# Altium PCB PCB1.PcbDoc
Units mm, origin at the board's own origin, x right, y up, seen from the top; angles counter-clockwise.
Board outline 42 x 42 mm, 4 copper layers (Top Layer, Int1 (GND), Int2 (PWR), Bottom Layer), stack 1.585 mm thick; 56 components, 41 nets, 206 pads, 92 vias.
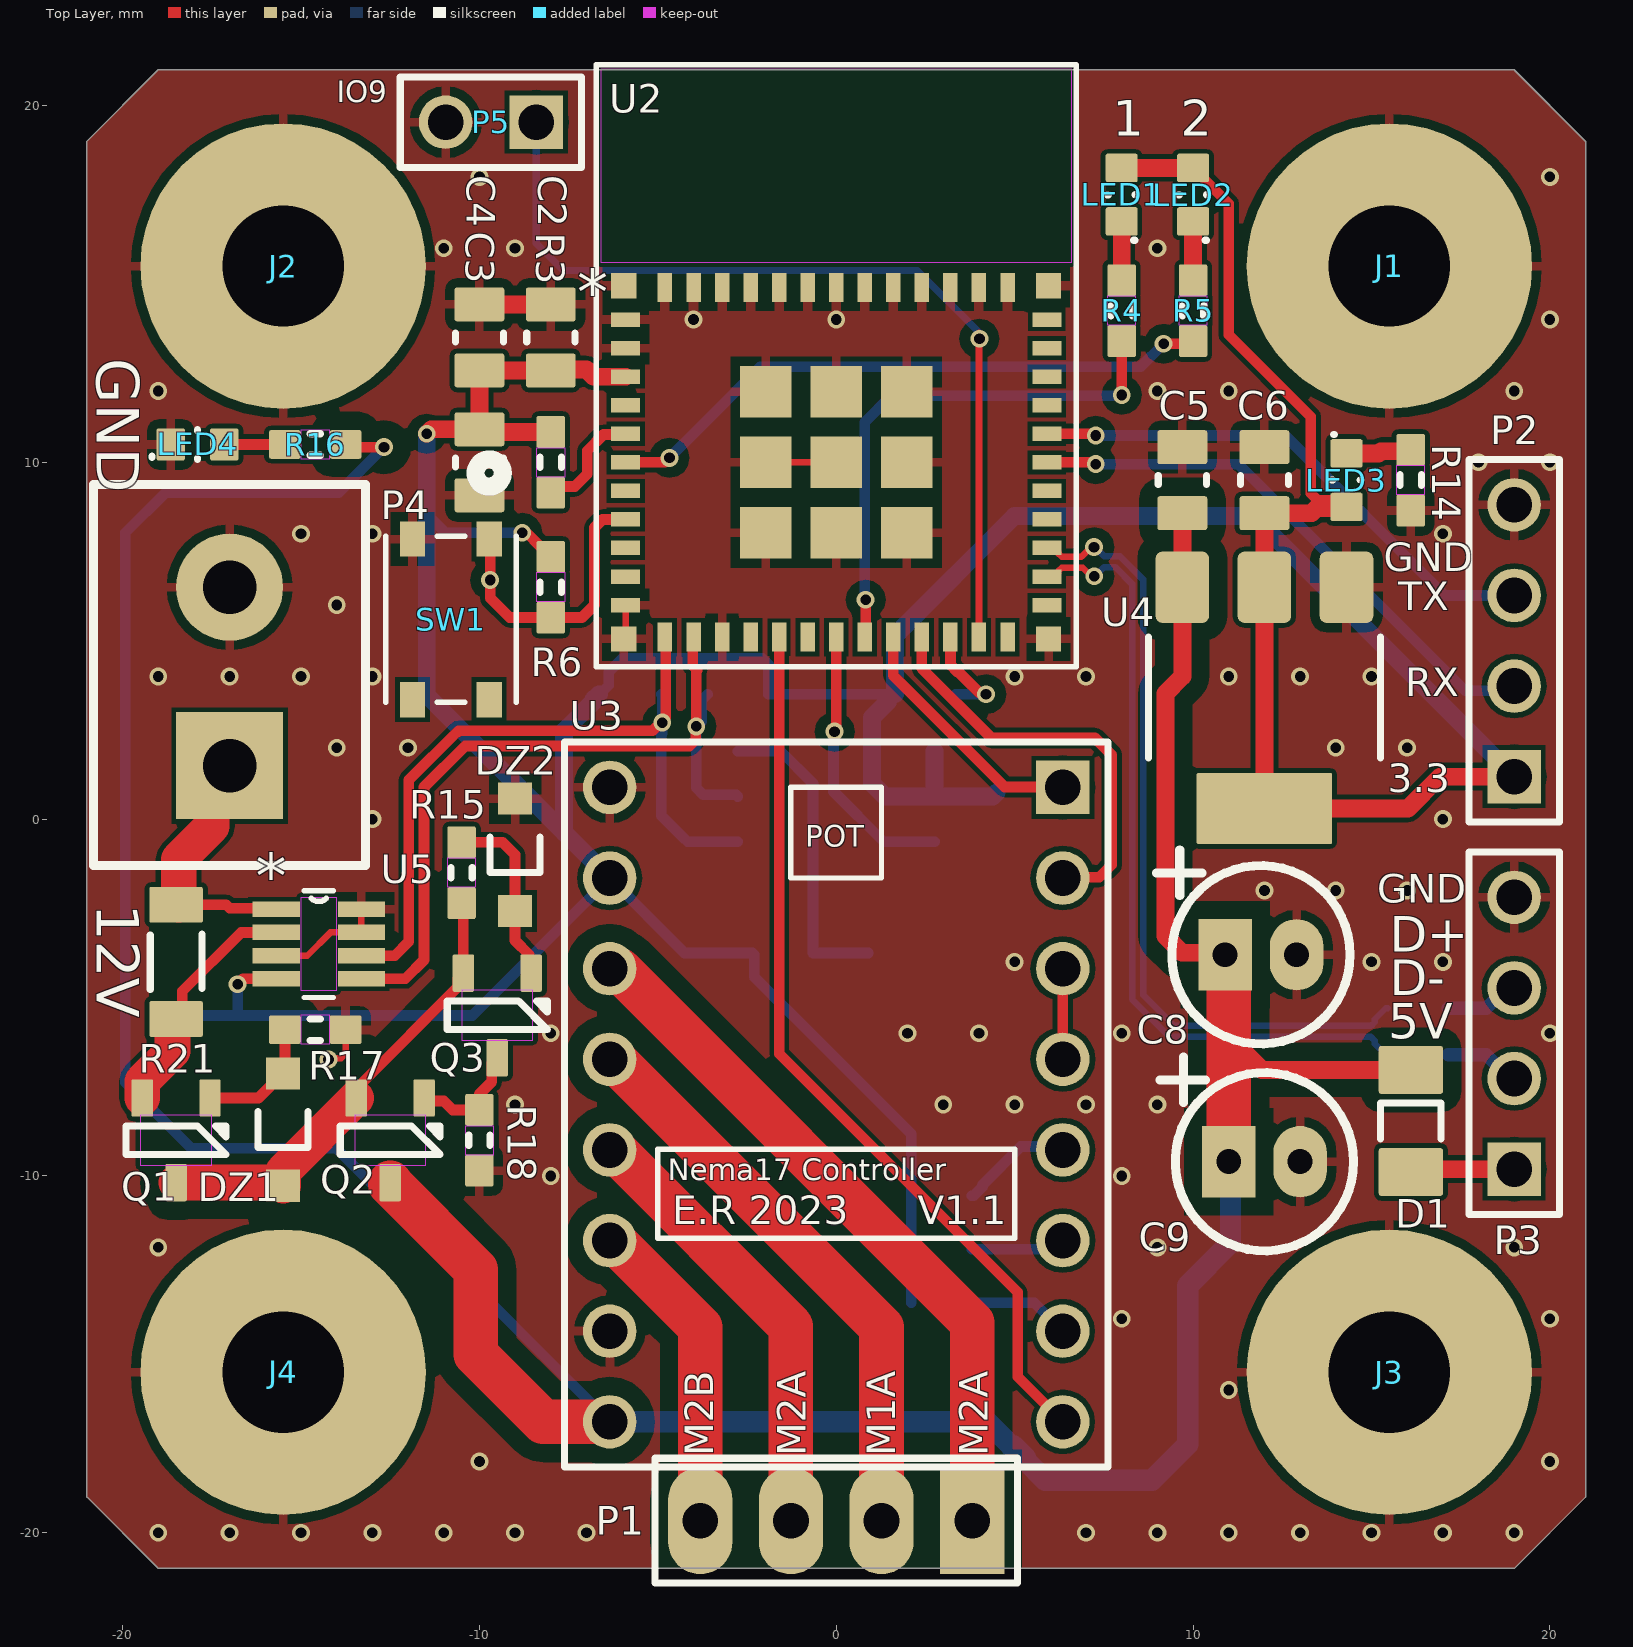
[diagram p0: Top Layer view]
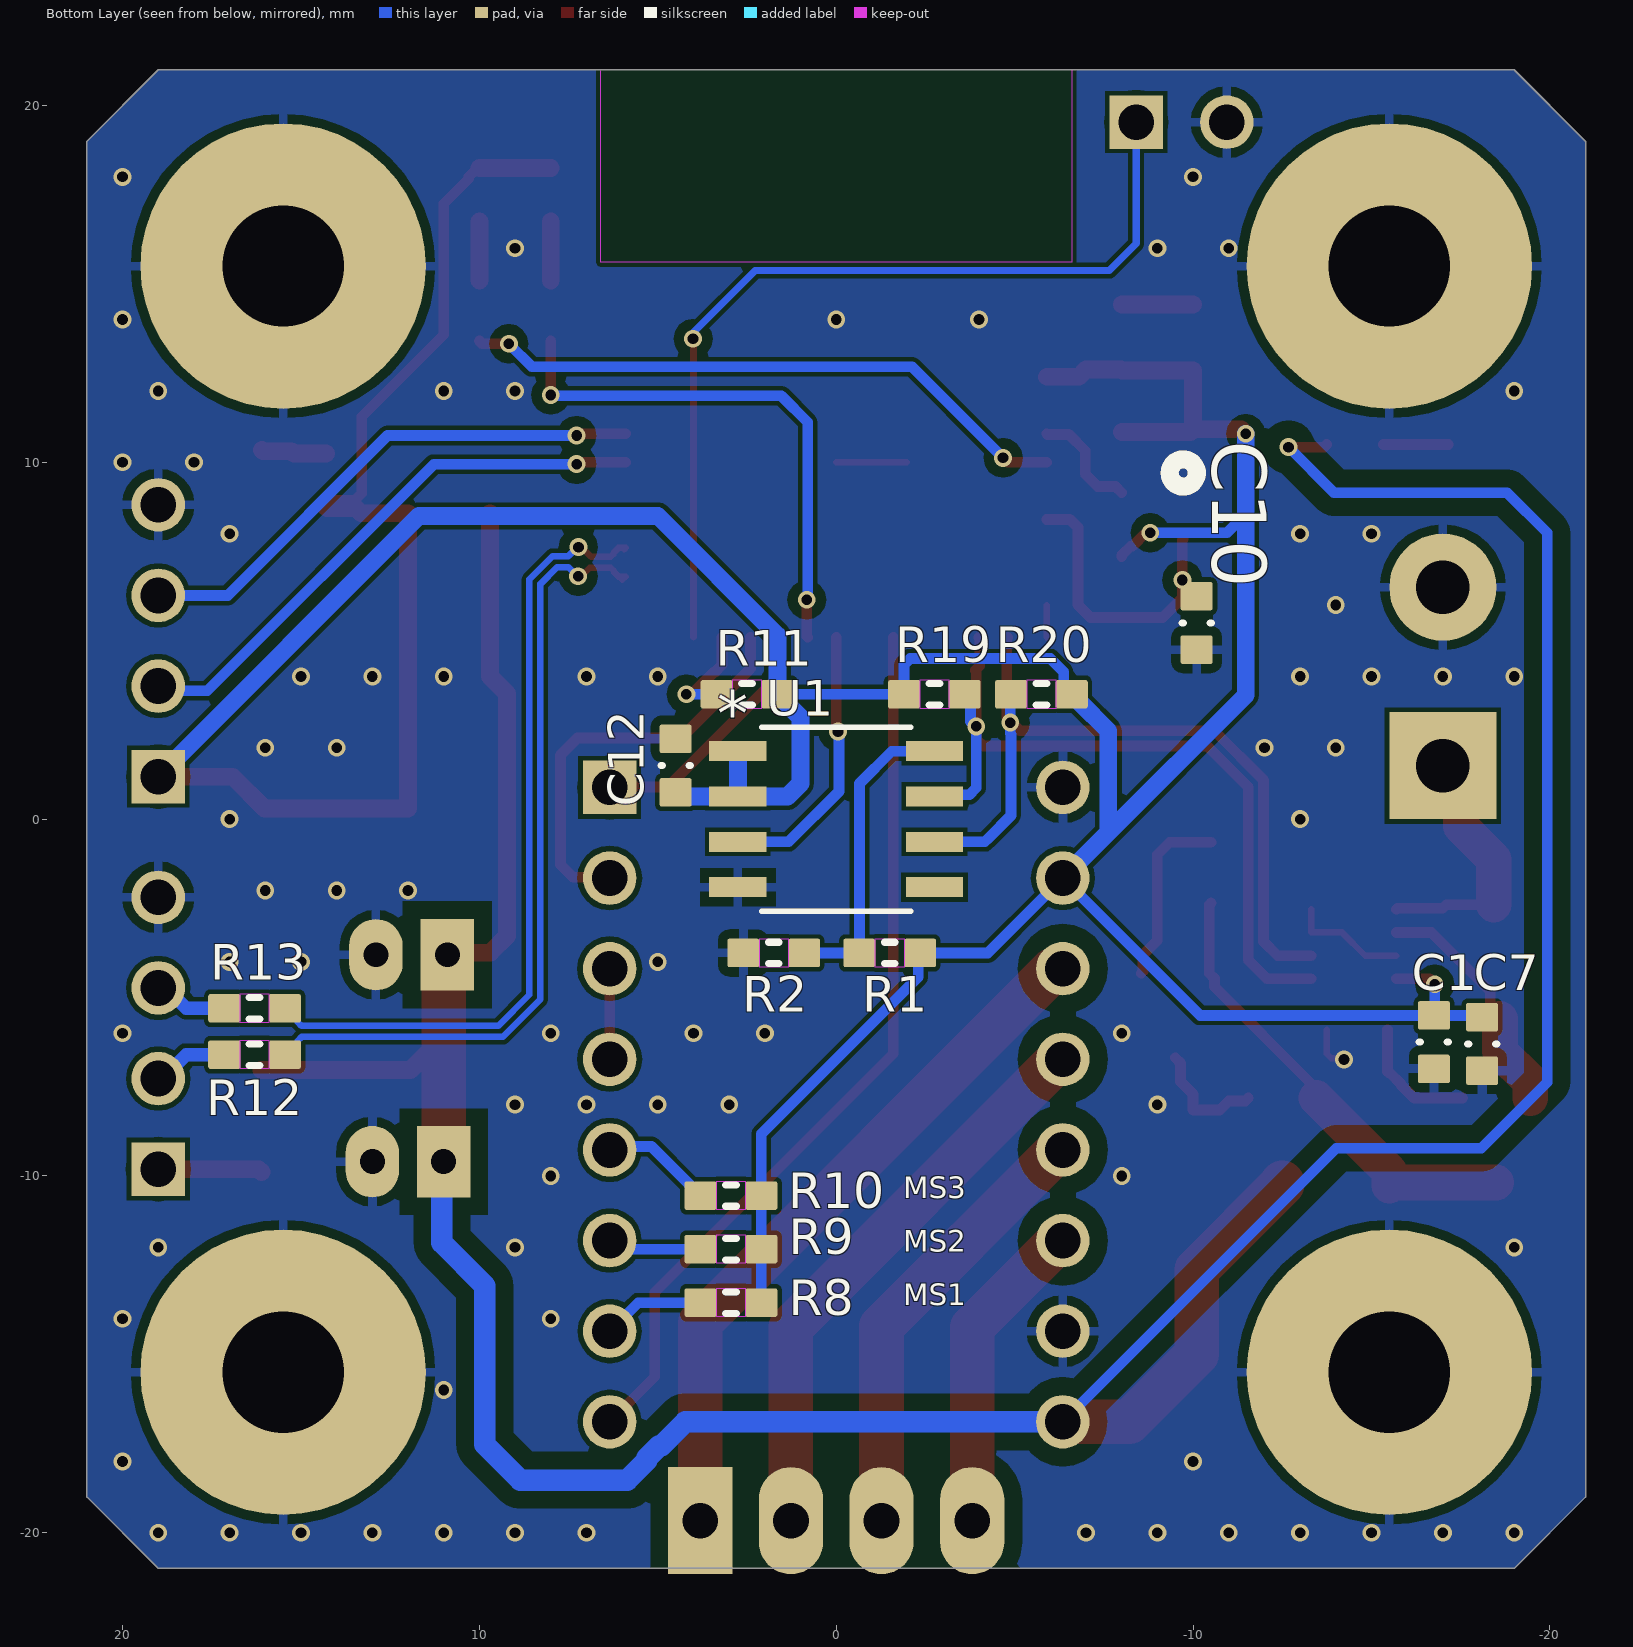
[diagram p1: Bottom Layer view, seen from below]
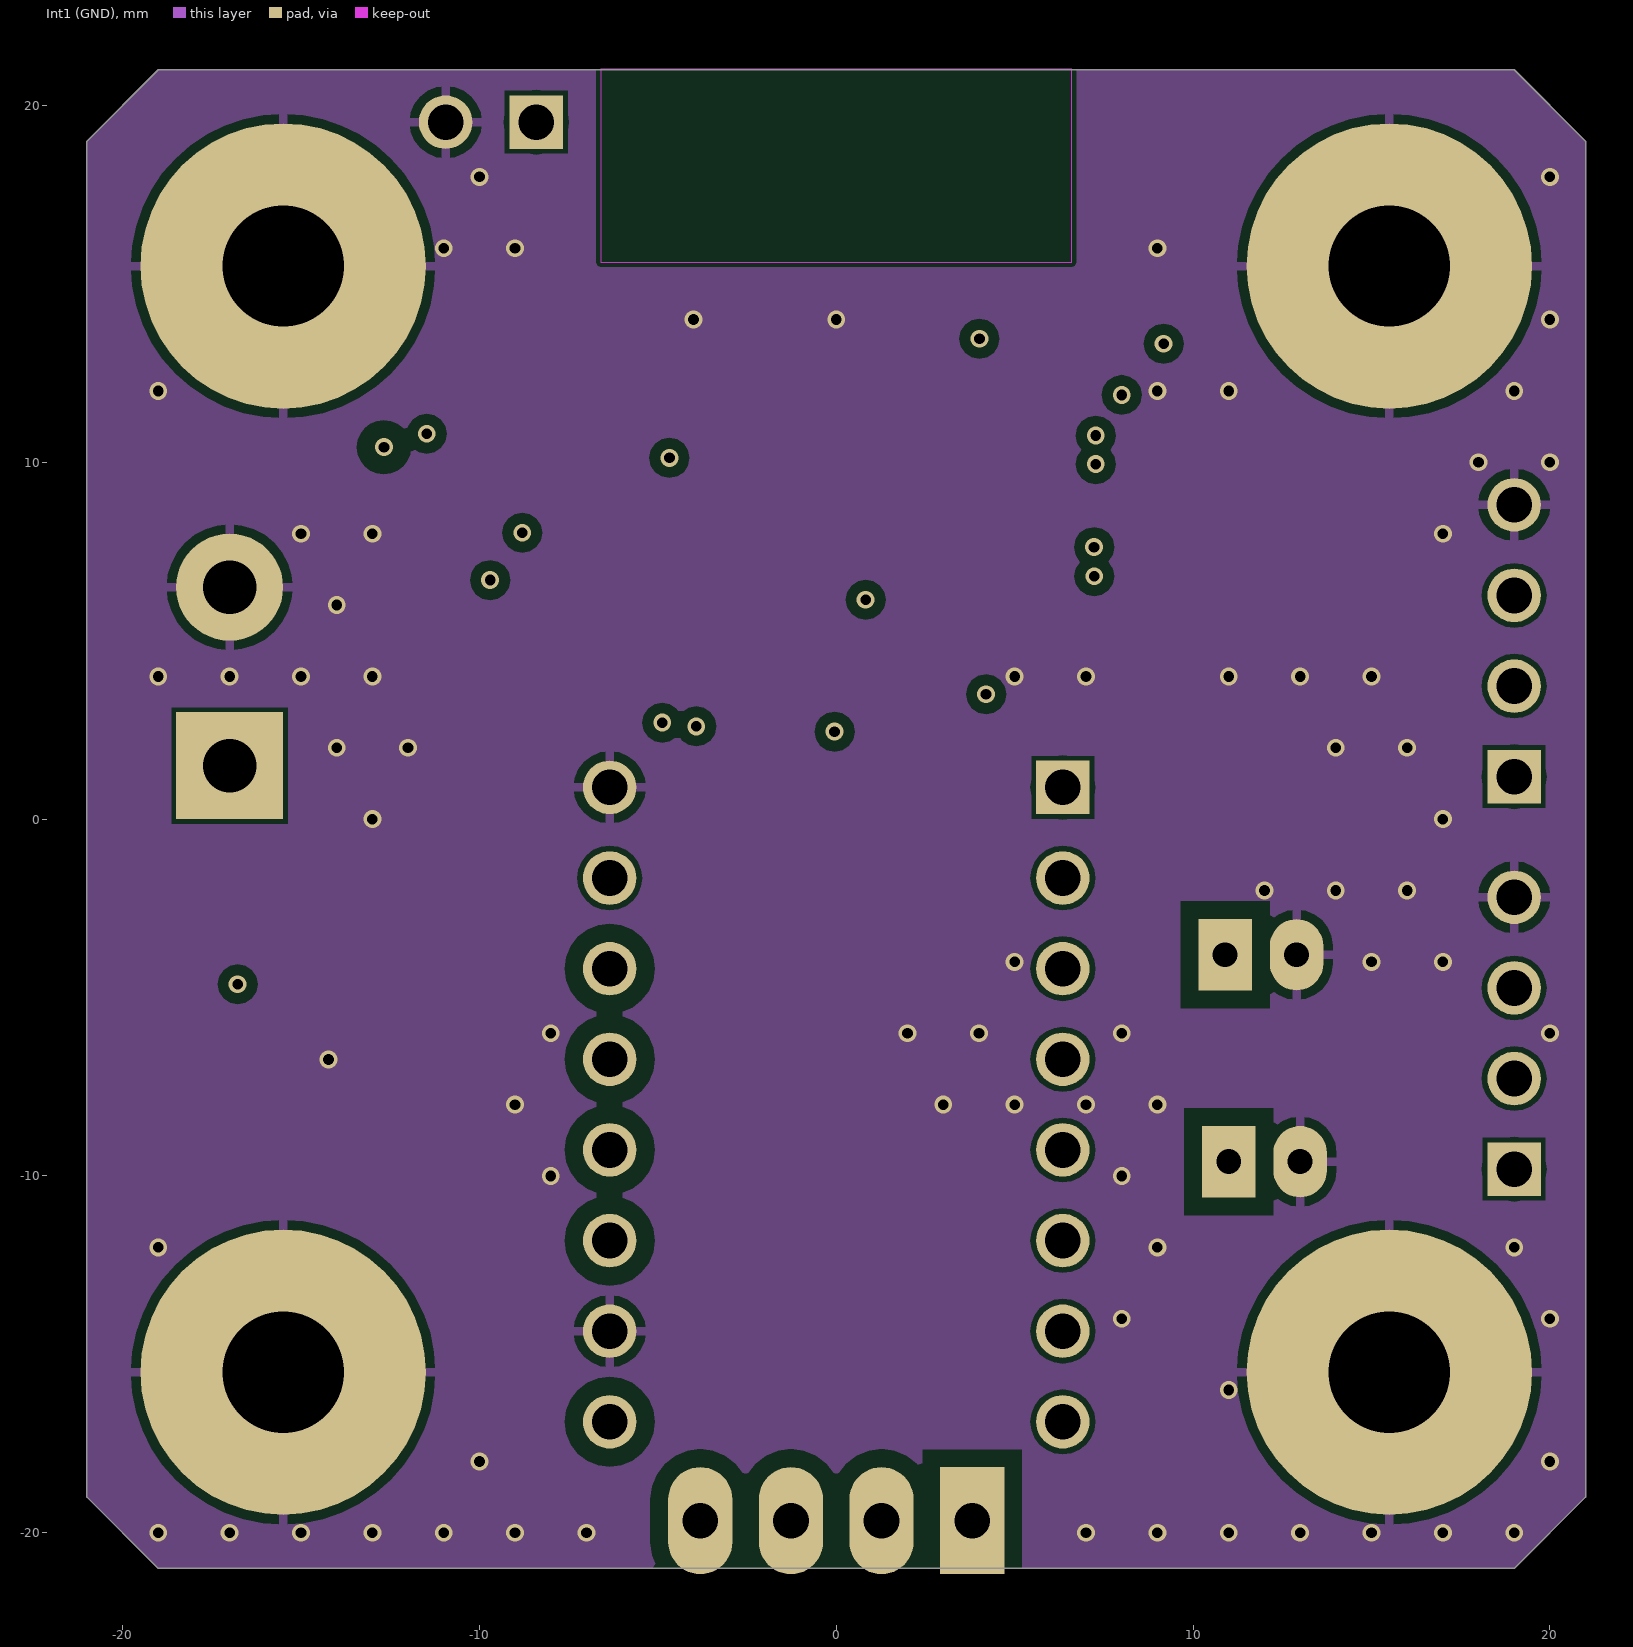
[diagram p2: Int1 (GND)]
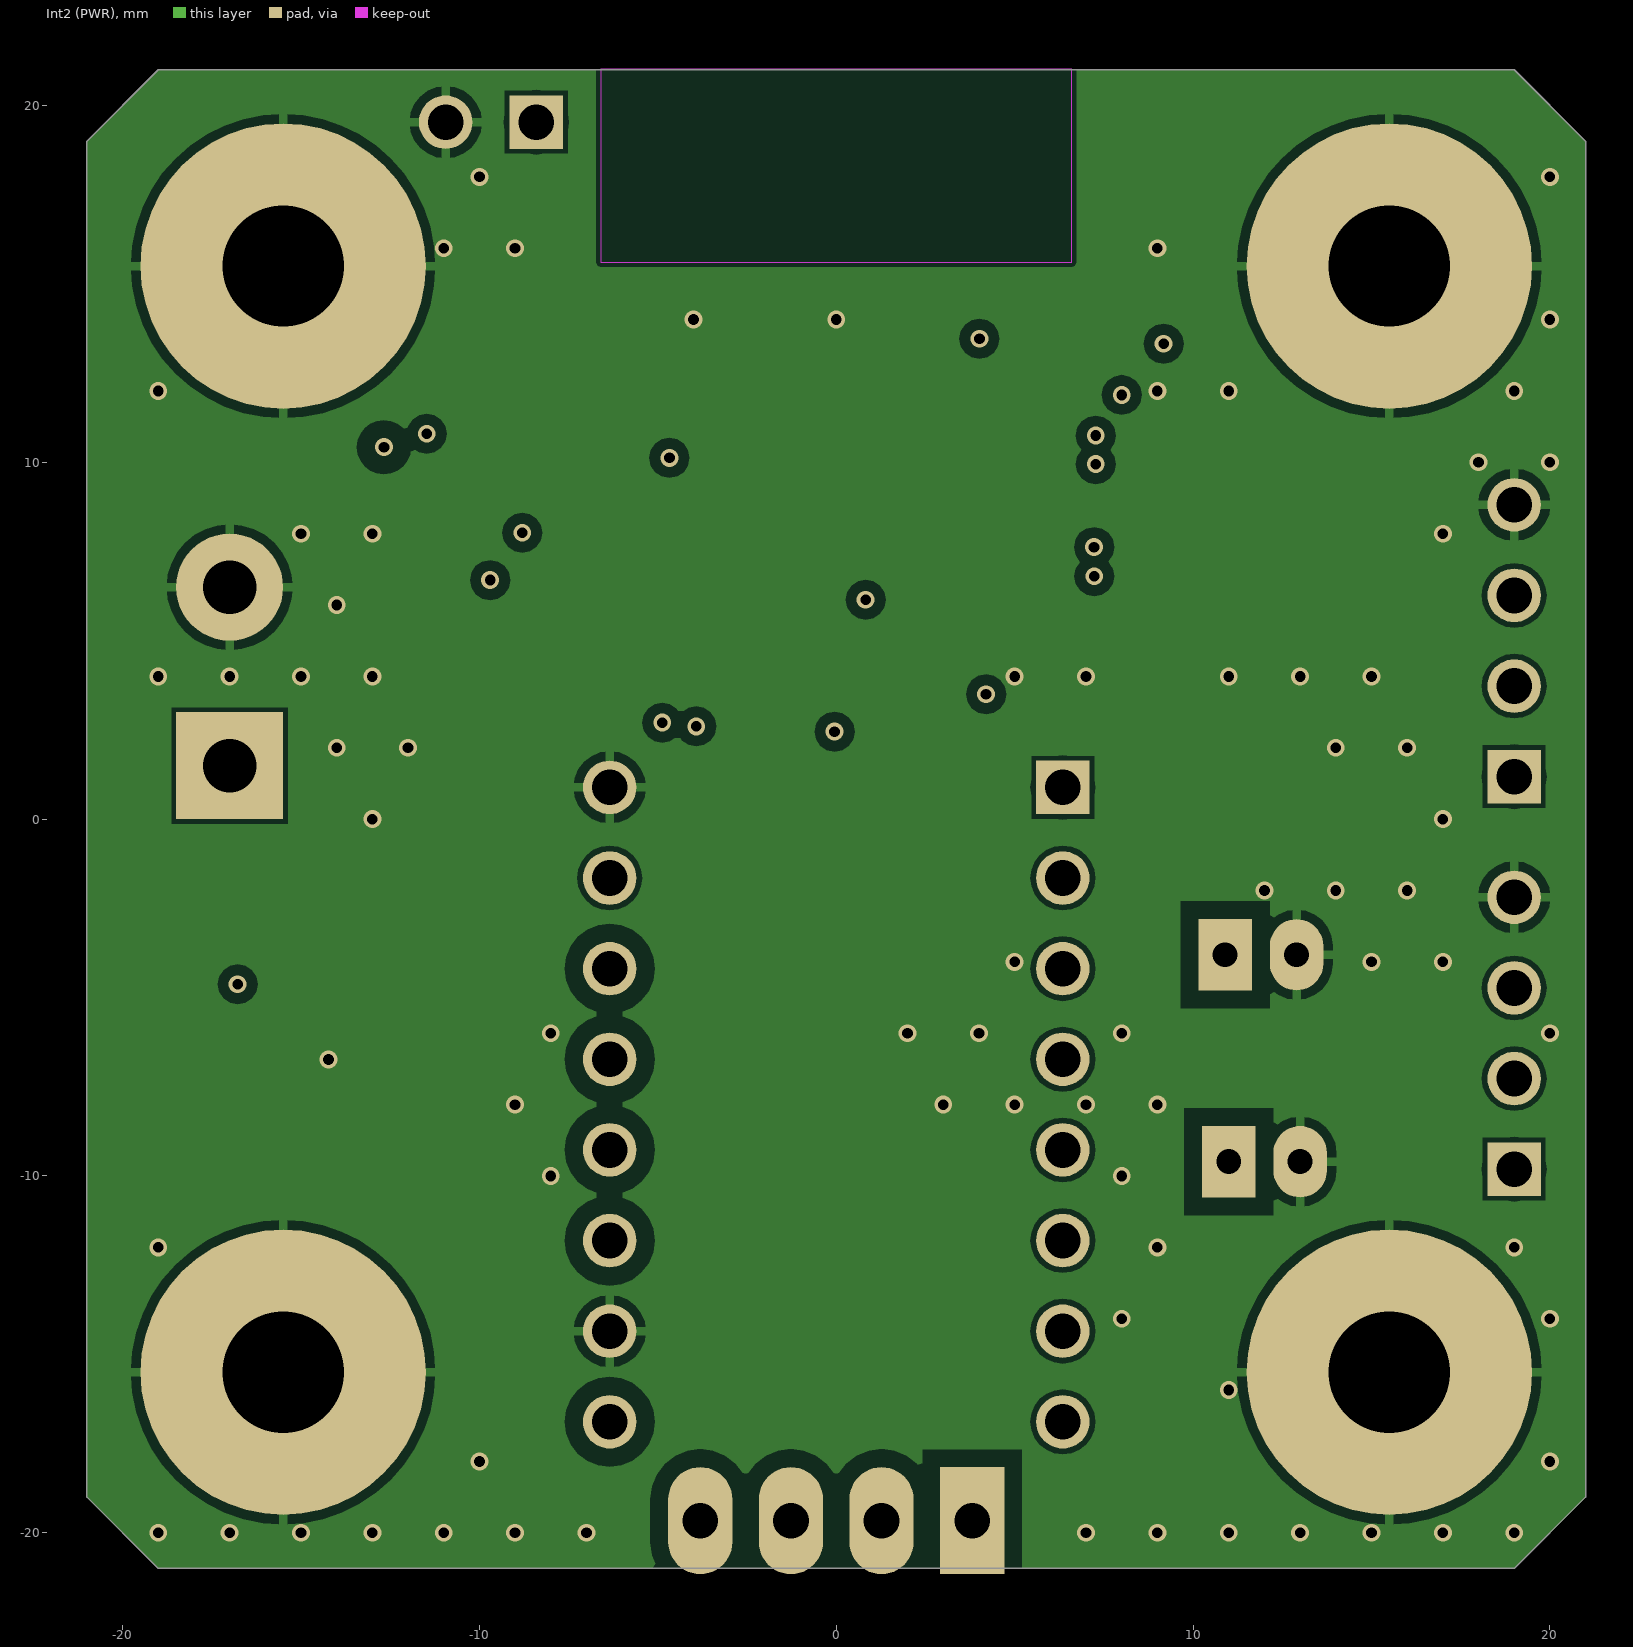
[diagram p3: Int2 (PWR)]
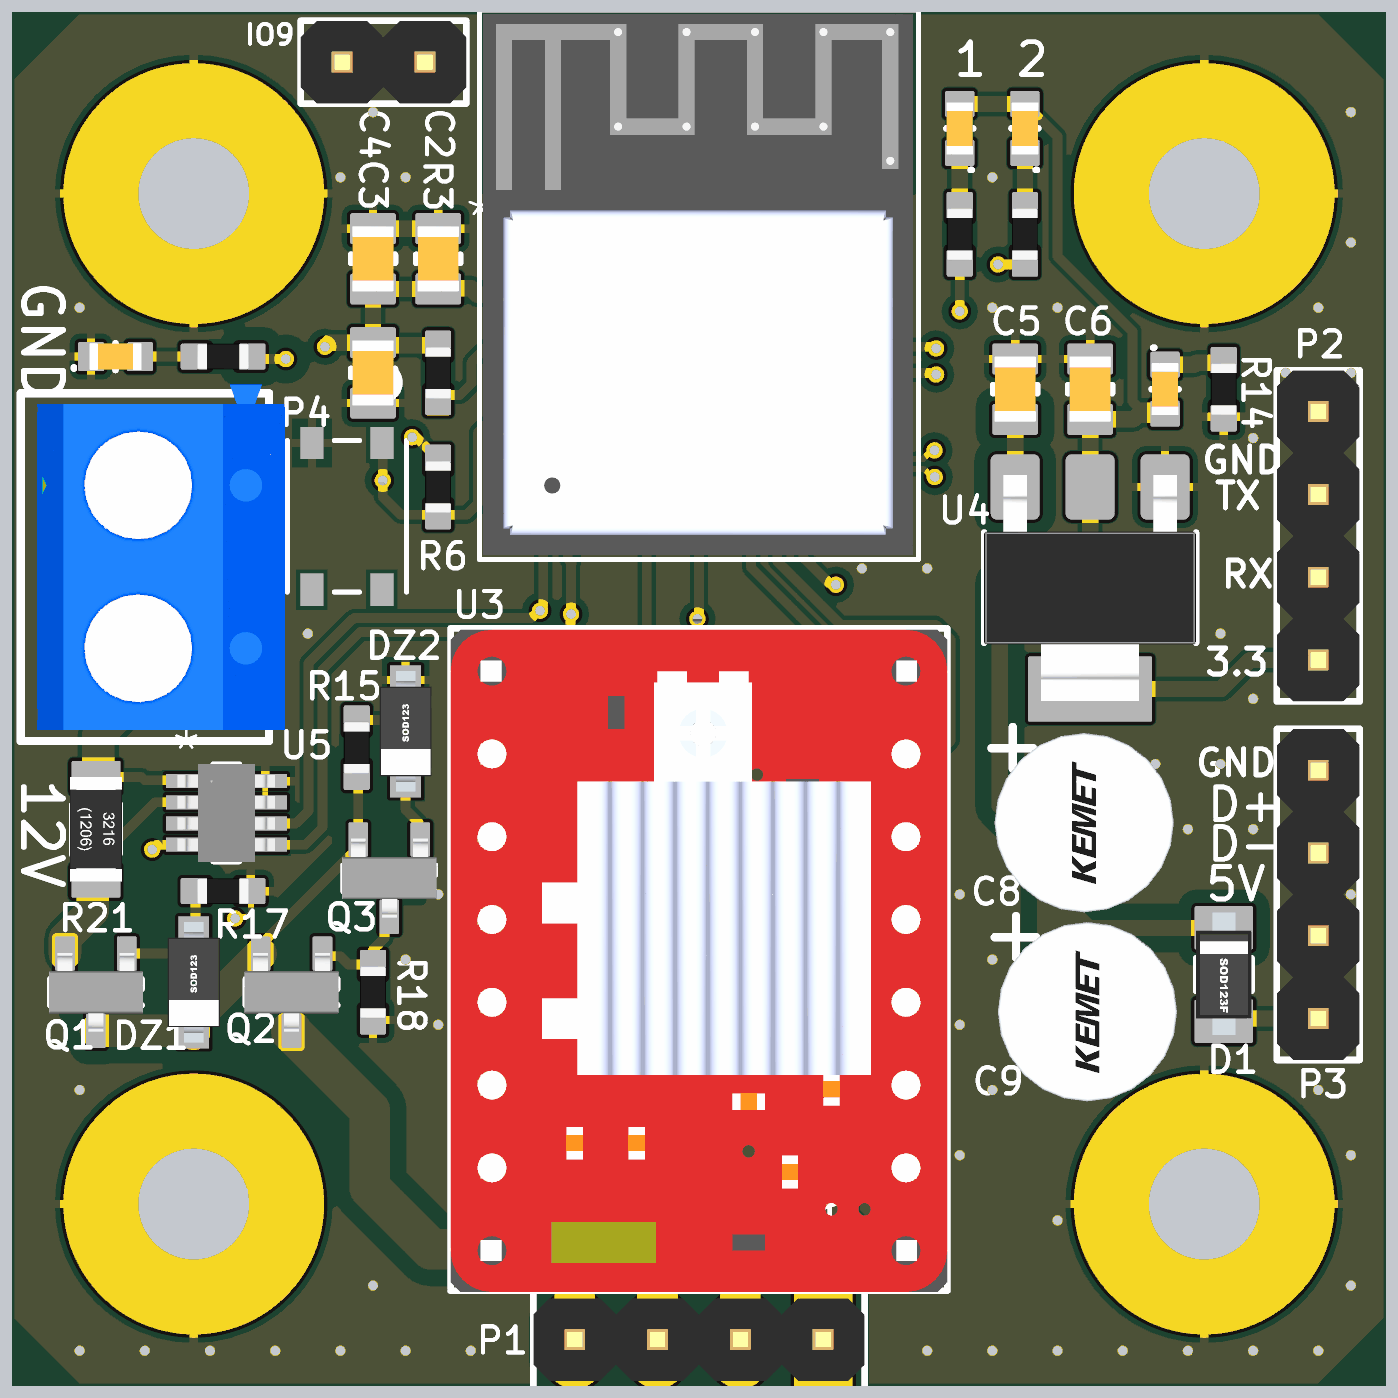
[diagram p4: 3D render of the assembled board from above, using the file's embedded part models]
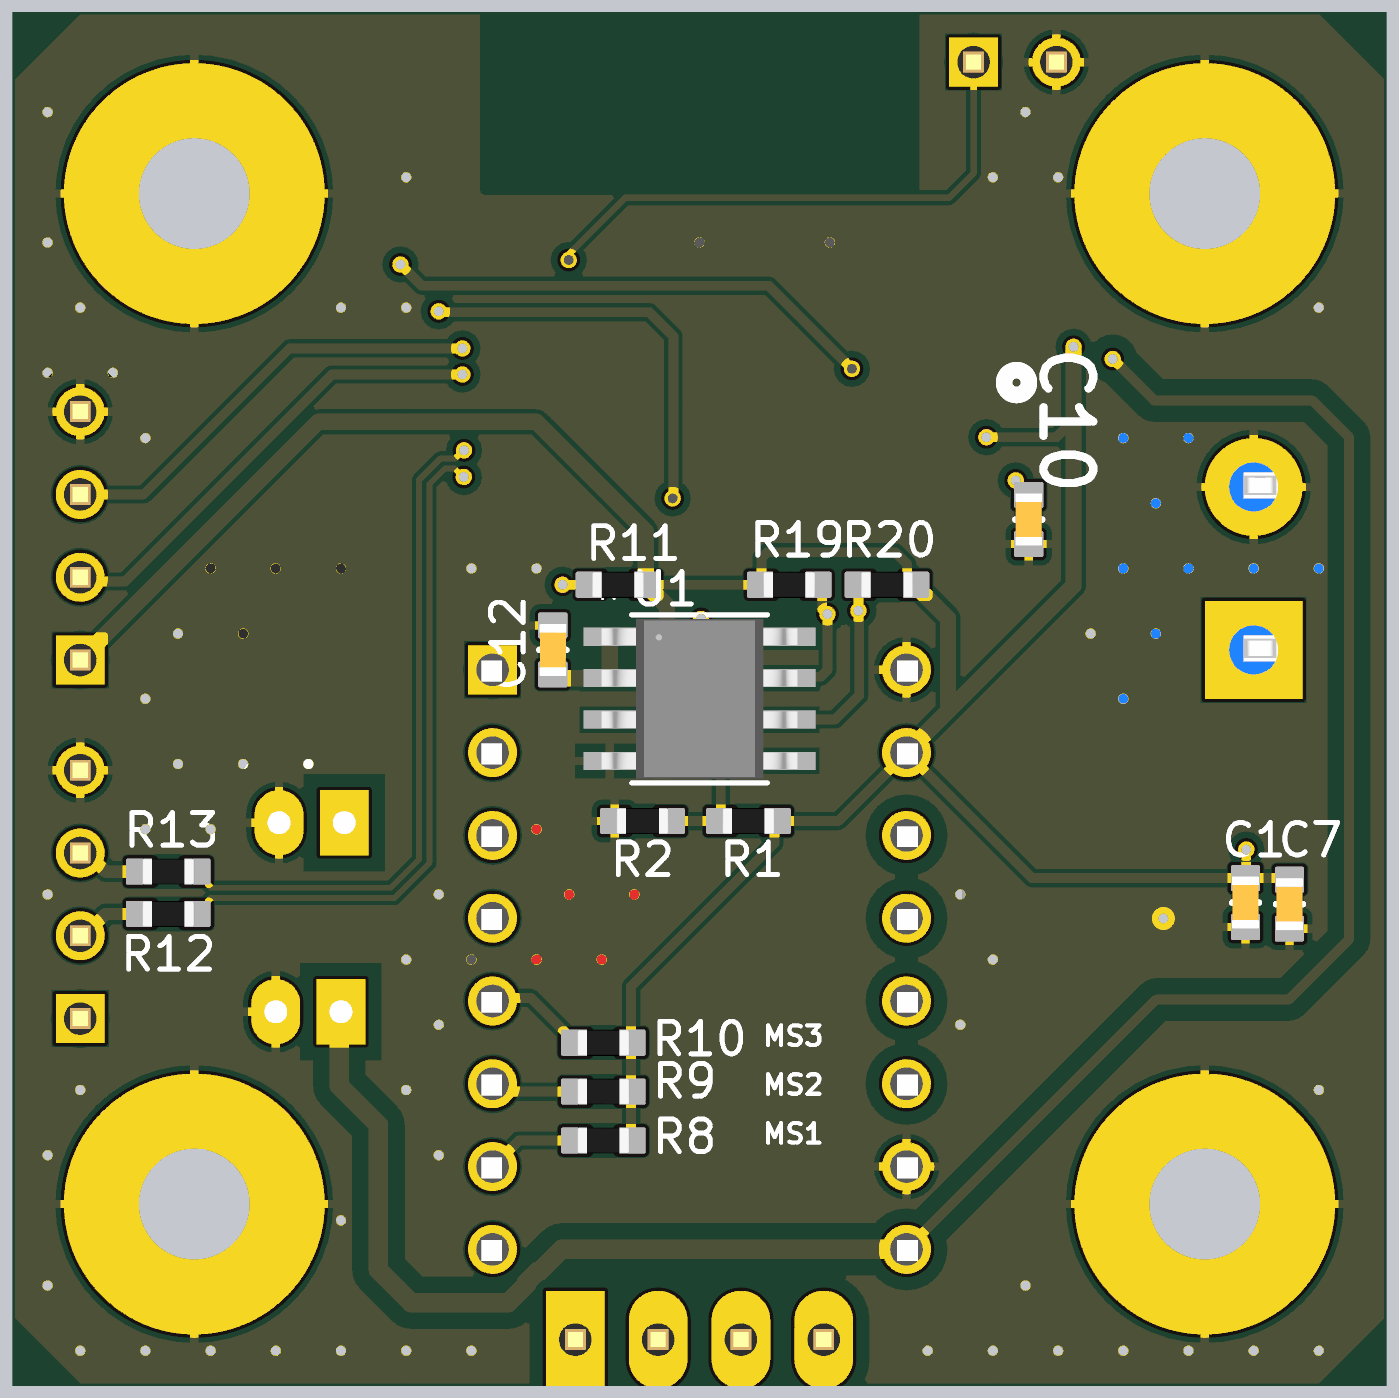
[diagram p5: 3D render of the assembled board from below, using the file's embedded part models]

## Layer stack, top to bottom
Top Solder: solder mask 0.035, SM-001, Dk 4
Top Layer: signal copper 0.035
Dielectric 2: prepreg 0.21, PP-017, Dk 4.6
Int1 (GND): signal copper 0.015
Dielectric 3: core 1.065, Core-039, Dk 4.6
Int2 (PWR): signal copper 0.015
Dielectric 4: prepreg 0.21, PP-017, Dk 4.6
Bottom Layer: signal copper 0.035
Bottom Solder: solder mask 0.035, SM-001, Dk 4

## Board outline
-21,-19 -21,19 -19,21 19,21 21,19 21,-19 19,-21 -19,-21

## Design rules (kind name [scope] priority, off if disabled: settings)
Clearance Clearance_Power [InNetClass('Power')] p1: gap=0.5 ignorepadtopadclearanceinfootprint=FALSE except(0.3: Arc-THPad Track-THPad SMDPad-THPad THPad-THPad)
Clearance Clearance_signal [All] p2: gap=0.127 ignorepadtopadclearanceinfootprint=FALSE except(0.254: Arc-Via Track-Via THPad-Via Via-Via; 0.4: SMDPad-Hole THPad-Hole Via-Hole Fill-Hole Poly-Hole Region-Hole)
ComponentClearance [All] p1 off: gap=0.254 collisioncheckmode=3 verticalgap=0.254 showdistances=FALSE
DiffPairsRouting [All] p1: maxlimit=0.254 minlimit=0.127 mostfreqgap=0.254 toplayer_maxgap=0.127 toplayer_prefgap=0.127 toplayer_minwidth=0.182 toplayer_maxwidth=0.182 toplayer_prefwidth=0.182 bottomlayer_maxgap=0.127 bottomlayer_prefgap=0.127 bottomlayer_minwidth=0.182 bottomlayer_maxwidth=0.182 bottomlayer_prefwidth=0.182 impedanceprofiledriven=TRUE impedanceprofileid={B48823B5-F17F-4A22-9D6E-0B69BC30809E} impedanceprofilevalue=90.000000 maxuncoupledlength=12.7
Height [All] p1 off: minheight=0 maxheight=25.4 prefheight=12.7
HoleSize [All] p1 off: absolutevalues=TRUE maxlimit=2.54 minlimit=0.025 maxpercent=80.000 minpercent=20.000
MinimumSolderMaskSliver [All] p1 off: minsoldermaskwidth=0.254
PasteMaskExpansion [All] p1 off: expansion=0
PlaneConnect [All] p1: pad.planeconnectstyle=Relief pad.reliefexpansion=0.508 pad.reliefentries=4 pad.reliefconductorwidth=0.254 pad.reliefairgap=0.254 via.planeconnectstyle=Direct via.reliefexpansion=0.508 via.reliefentries=4 via.reliefconductorwidth=0.254 via.reliefairgap=0.254
PolygonConnect PolygonConnect_Power [InNetClass('Power')] p1: connectstyle=Direct reliefconductorwidth=0.254 reliefentries=4 polygonreliefangle="90 Angle" airgapwidth=0.254
PolygonConnect [All] p2: thpad.connectstyle=Relief thpad.reliefconductorwidth=0.254 thpad.reliefentries=4 thpad.polygonreliefangle="90 Angle" thpad.airgapwidth=0.254 smdpad.connectstyle=Relief smdpad.reliefconductorwidth=0.254 smdpad.reliefentries=4 smdpad.polygonreliefangle="90 Angle" smdpad.airgapwidth=0.254 via.connectstyle=Direct via.reliefconductorwidth=0.254 via.reliefentries=4 via.polygonreliefangle="90 Angle" via.airgapwidth=0.254
RoomDefinition main [InComponentClass('main')] p1 off: confinementstyle=ConfineIn formatcopy=TRUE lockcomponents=FALSE outline 22,-19 300,-19 300,6 22,6
RoutingVias [All] p1: holewidth=0.3 width=0.5 viastyle="Through Hole" minholewidth=0.15 minwidth=0.25 maxholewidth=1 maxwidth=1.3
SilkToSilkClearance [All] p1 off: silktosilkclearance=0.254
SilkToSolderMaskClearance [IsPad] p1 off: minsilkscreentomaskgap=0.254 clearancetoexposedcopper=TRUE
SolderMaskExpansion [All] p1 off: expansion=0.102 istentingtop=FALSE
Width Width_Power(5A) [InNetClass('Power')] p1: maxlimit=2 minlimit=0.3 preferedwidth=1.25
Width Width_signal [All] p2: maxlimit=1 minlimit=0.1 preferedwidth=0.2
21 further rules are at their usual default settings.

## Classes and differential pairs
net class Power: +12 M1A M1B M2A M2B NetDZ1_1 NetDZ1_2
differential pair USB_Diff: +USB_P -USB_N

## Components (designator, comment, footprint, x,y, rotation, side; value= is the part's Value field where it differs from the comment)
C1 "Capacitor-0603-1uF-25V-X5R" CAPACITOR-0603 -16.75,-6.25 r90 bottom value=1uF
C2 "Capacitor-0805-10uF-35V-X5R" CAPACITOR-0805 -8,13.5 r270 top value=10uF
C3 "Capacitor-0805-10uF-35V-X5R" CAPACITOR-0805 -10,10 r90 top value=10uF
C4 "Capacitor-0805-10uF-35V-X5R" CAPACITOR-0805 -10,13.5 r270 top value=10uF
C5 "Capacitor-0805-10uF-35V-X5R" CAPACITOR-0805 9.7,9.5 r270 top value=10uF
C6 "Capacitor-0805-10uF-35V-X5R" CAPACITOR-0805 12,9.5 r270 top value=10uF
C7 "Capacitor-0603-1uF-25V-X5R" CAPACITOR-0603 -18.1,-6.3 r90 bottom value=1uF
C8 "CAP ALUM 100UF 20% 25V RADIAL" CAPACITOR-Aluminium-5x11mm-2mmPitch 11.9,-3.8 r90 top value=100uF
C9 "CAP ALUM 100UF 20% 25V RADIAL" CAPACITOR-Aluminium-5x11mm-2mmPitch 12,-9.6 r90 top value=100uF
C10 "Capacitor-0603-1uF-25V-X5R" CAPACITOR-0603 -10.1,5.5 r90 bottom value=1uF
C12 "Capacitor-0603-1uF-25V-X5R" CAPACITOR-0603 4.5,1.5 r270 bottom value=1uF
D1 "SMD110PL-TP" SOD-123F 16.104,-8.458 r90 top
DZ1 "BZT52C6V2-TP" SOD-123 -15.5,-8.7 r270 top
DZ2 "BZT52C13-TP" SOD-123 -9,-1 r270 top
J1 "hole" HOLE-3.40MM-M3-8MMEYELET#1 16,16 r0 top
J2 "hole" HOLE-3.40MM-M3-8MMEYELET#2 -16,16 r0 top
J3 "hole" HOLE-3.40MM-M3-8MMEYELET#3 16,-16 r0 top
J4 "hole" HOLE-3.40MM-M3-8MMEYELET#4 -16,-16 r0 top
LED1 "B1911USD-20D000114U1930" LED-0603-2PIN 8,17.5 r90 top
LED2 "B1911USD-20D000114U1930" LED-0603-2PIN 10,17.5 r90 top
LED3 "B1911USD-20D000114U1930" LED-0603-2PIN 14.3,9.5 r270 top
LED4 "B1911USD-20D000114U1930" LED-0603-2PIN -17.9,10.5 r0 top
P1 "4pos-TH-2.54mm" HDR1X4-W 0,-19.66 r180 top
P2 "UART" HDR1X4 19,5 r90 top
P3 "USB" HDR1X4 19,-6 r90 top
P4 "2pos-TH-5.0mm" "Weco 2" -17,4 r90 top
P5 "2pos-TH-2.54mm" HDR1X2 -8.407,19.533 r180 top
Q1 "SSM3J332R" SOT-23-3 -18.5,-9 r180 top
Q2 "SSM3J332R" SOT-23-3 -12.5,-9 r180 top
Q3 "SSM3J332R" SOT-23-3 -9.5,-5.5 r180 top
R1 "SMT resistor" Resistor-0603 -1.5,-3.75 r180 bottom value=0
R2 "SMT resistor" Resistor-0603 1.75,-3.75 r180 bottom value=NP
R3 "SMT resistor" Resistor-0603 -8,10 r90 top value=10k
R4 "SMT resistor" Resistor-0603 8,14.25 r90 top value=1k
R5 "SMT resistor" Resistor-0603 10,14.25 r90 top value=1k
R6 "SMT resistor" Resistor-0603 -8,6.5 r90 top value=10k
R8 "SMT resistor" Resistor-0603 2.95,-13.55 r180 bottom value=0
R9 "SMT resistor" Resistor-0603 2.95,-12.05 r180 bottom value=0
R10 "SMT resistor" Resistor-0603 2.95,-10.55 r180 bottom value=0
R11 "SMT resistor" Resistor-0603 2.5,3.5 r180 bottom value=10k
R12 "SMT resistor" Resistor-0603 16.3,-6.6 r180 bottom value=0
R13 "SMT resistor" Resistor-0603 16.3,-5.3 r180 bottom value=0
R14 "SMT resistor" Resistor-0603 16.1,9.5 r90 top value=1k
R15 "SMT resistor" Resistor-0603 -10.5,-1.5 r270 top value=10k
R16 "SMT resistor" Resistor-0603 -14.6,10.5 r0 top value=1k
R17 "SMT resistor" Resistor-0603 -14.6,-5.9 r180 top value=10k
R18 "SMT resistor" Resistor-0603 -10,-9 r90 top value=10k
R19 "SMT resistor" Resistor-0603 -2.75,3.5 r0 bottom value=4.7k
R20 "SMT resistor" Resistor-0603 -5.75,3.5 r180 bottom value=4.7k
R21 "SMT resistor" RESISTOR-1206 -18.5,-4 r270 top value=10mR
SW1 "PTS815 SJM 250 SMTR LFS" "SW4_PTS815 SJM 250 SMTR LFS_CNK" -10.8,5.6 r270 top
U1 "AS5600-ASOM" AS5600L-ASOM_AMS 0,0 r180 bottom
U2 "ESP32-C3-MINI-1-H4" ESP32-C3-MINI-1_EXP 0,12.705 r0 top
U3 "Stepper Driver" A4899 0,-8 r270 top
U4 "NCV1117ST33T3G" SOT-223-3/TO-261-3S 12,6.5 r180 top
U5 "INA219AIDCNR" SOT-23-8 -14.5,-3.5 r0 top

## Footprints (in the part's own frame and the unit in brackets; to place one, negate y for a bottom-side part, rotate by r counter-clockwise, add the part's x,y. Pads: shape width x height; smd on the part's side, far side on the other; paste and mask are expansions set on the pad)
A4899 [mm] "Connector; Header; 2 Position"
  rect 1.5x1.5 hole 1: 1(-8.89,6.35)
  round 1.5 hole 1: 2(-6.35,6.35) 3(-3.81,6.35) 4(-1.27,6.35) 5(1.27,6.35) 6(3.81,6.35) 7(6.35,6.35) 8(8.89,6.35) 9(8.89,-6.35) 10(6.35,-6.35) 11(3.81,-6.35) 12(1.27,-6.35) 13(-1.27,-6.35) 14(-3.81,-6.35) 15(-6.35,-6.35) 16(-8.89,-6.35)
  silkscreen extent -10.16,-7.62 10.16,7.62, body extent -10.12,-7.62 10.2,7.62, height 10.04
AS5600L-ASOM_AMS [mil]
  rect 63.11x22 smd paste+0 mask+0: 1(-108.56,75) 2(-108.56,25) 3(-108.56,-25) 4(-108.56,-75) 5(108.56,-75) 6(108.56,-25) 7(108.56,25) 8(108.56,75)
  silkscreen extent -82,-102 82,102, body extent -118,-96 118,96, height 69
CAPACITOR-0603 [mm] "Metric 1608, EIA 0603. Per Yageo Product Specification V2.2"
  rrect15% 0.8x0.9 smd: 1(-0.75,0) 2(0.75,0)
  Top Layer pour cut-out: -0.35,0.45 0.35,0.45 0.35,-0.45 -0.35,-0.45
  silkscreen extent 0,-0.41 0,0.41, body extent -0.93,-0.41 0.93,0.41, height 0.81
CAPACITOR-0805 [mm] "Metric 2012, EIA 0805, Per Yageo Product Specification V2.2"
  rrect15% 0.95x1.4 smd: 1(-0.925,0) 2(0.925,0)
  silkscreen extent -0.13,-0.67 0.13,0.67, body extent -1.09,-0.64 1.09,0.64, height 1.26
CAPACITOR-Aluminium-5x11mm-2mmPitch [mm] "5mm dia x 11mm height Capacitor"
  rect 2x1.5 hole 0.7: 1(0,1)
  oval 2x1.5 hole 0.7: 2(0,-1)
  silkscreen extent -2.5,-2.5 2.94,2.93, body extent -2.75,-2.67 2.75,2.83, height 12.61
ESP32-C3-MINI-1_EXP [mil]
  rect 32x16 smd paste+0 mask+0: 1(-232.28,50.98) 2(-232.28,19.48) 3(-232.28,-12.01) 4(-232.28,-43.51) 5(-232.28,-75) 6(-232.28,-106.5) 7(-232.28,-138) 8(-232.28,-169.49) 9(-232.28,-200.99) 10(-232.28,-232.48) 11(-232.28,-263.98) 25(232.28,-263.98) 26(232.28,-232.48) 27(232.28,-200.99) 28(232.28,-169.49) 29(232.28,-138) 30(232.28,-106.5) 31(232.28,-75) 32(232.28,-43.51) 33(232.28,-12.01) 34(232.28,19.48) 35(232.28,50.98)
  rect 16x32 smd paste+0 mask+0: 12(-188.98,-299.41) 13(-157.48,-299.41) 14(-125.98,-299.41) 15(-94.49,-299.41) 16(-62.99,-299.41) 17(-31.5,-299.41) 18(0,-299.41) 19(31.5,-299.41) 20(62.99,-299.41) 21(94.49,-299.41) 22(125.98,-299.41) 23(157.48,-299.41) 24(188.98,-299.41) 36(188.98,86.41) 37(157.48,86.41) 38(125.98,86.41) 39(94.49,86.41) 40(62.99,86.41) 41(31.5,86.41) 42(0,86.41) 43(-31.5,86.41) 44(-62.99,86.41) 45(-94.49,86.41) 46(-125.98,86.41) 47(-157.48,86.41) 48(-188.98,86.41)
  rect 57x57 smd: 49(0,-106.5) 54(77.76,-28.74) 55(77.76,-106.5) 56(77.76,-184.26) 57(0,-184.26) 58(-77.76,-184.26) 59(-77.76,-106.5) 60(-77.76,-28.74) 61(0,-28.74)
  rect 28x28 smd: 50(234.25,88.38) 51(234.25,-301.38) 52(-234.25,-301.38) 53(-234.25,88.38)
  Keep-Out Layer region: 260,327 -260,327 -260,114 260,114
  silkscreen extent -265,-332 265,332, body extent -261,-327 259,327, height 100
HDR1X2 [mm] "Connector; Header; 2 Position"
  rect 1.5x1.5 hole 1: 1(0,0)
  round 1.5 hole 1: 2(2.54,0)
  silkscreen extent -1.27,-1.27 3.81,1.27, body extent -1.27,-1.27 3.81,1.27, height 8.54
HDR1X4 [mm] "Connector; Header; 2 Position"
  rect 1.5x1.5 hole 1: 1(-3.81,0)
  round 1.5 hole 1: 2(-1.27,0) 3(1.27,0) 4(3.81,0)
  silkscreen extent -5.08,-1.27 5.08,1.27, body extent -5.08,-1.27 5.08,1.27, height 8.54
HDR1X4-W [mm] "Connector; Header; 2 Position"
  rect 1.8x3 hole 1: 1(-3.81,0)
  oval 1.8x3 hole 1: 2(-1.27,0) 3(1.27,0) 4(3.81,0)
  silkscreen extent -5.08,-1.75 5.08,1.75, body extent -5.08,-1.27 5.08,1.27, height 8.54
HOLE-3.40MM-M3-8MMEYELET#1 [mm] "Hole 3.40mm with round pad for eyelet"
  round 8 hole 3.4: 1(-0.5,-0.5)
HOLE-3.40MM-M3-8MMEYELET#2 [mm] "Hole 3.40mm with round pad for eyelet"
  round 8 hole 3.4: 1(0.5,-0.5)
HOLE-3.40MM-M3-8MMEYELET#3 [mm] "Hole 3.40mm with round pad for eyelet"
  round 8 hole 3.4: 1(-0.5,0.5)
HOLE-3.40MM-M3-8MMEYELET#4 [mm] "Hole 3.40mm with round pad for eyelet"
  round 8 hole 3.4: 1(0.5,0.5)
LED-0603-2PIN [mm] "Metric 1608, EIA 0603. Per Yageo Product Specification V2.2"
  rrect15% 0.8x0.9 smd: 1(-0.75,0) 2(0.75,0)
  Top Layer pour cut-out: -0.35,0.45 0.35,0.45 0.35,-0.45 -0.35,-0.45
  silkscreen extent -1.28,-0.41 0,0.41, body extent -0.93,-0.41 0.93,0.41, height 0.81
Resistor-0603 [mm] "Metric 1608, EIA 0603 Drawn per Yageo \"Chip resistors Mounting\" rev 10"
  rrect15% 0.9x0.8 smd: 1(-0.85,0) 2(0.85,0)
  Top Layer pour cut-out: -0.4,0.4 0.4,0.4 0.4,-0.4 -0.4,-0.4
  Top Layer keep-out region: -0.4,0.4 0.4,0.4 0.4,-0.4 -0.4,-0.4
  silkscreen extent -0.15,-0.3 0.15,0.3, body extent -0.8,-0.4 0.8,0.4, height 0.55
RESISTOR-1206 [mm] "Metric 3216, EIA 1206. Drawn per Yageo \"Chip resistors Mounting\" rev 10"
  rrect10% 1x1.5 smd: 1(-1.6,0) 2(1.6,0)
  Top Layer pour cut-out: -1.1,0.75 1.1,0.75 1.1,-0.75 -1.1,-0.75
  silkscreen extent -0.77,-0.72 0.77,0.73, body extent -1.6,-0.8 1.6,0.8, height 0.55
SOD-123 [mm] "SOD-123. From Diodes DDZ6V2B-7 datasheet"
  rect 0.9x0.95 smd: 1(-1.575,0) 2(1.575,0)
  silkscreen extent -0.5,-0.7 0.5,0.7, body extent -1.85,-0.8 1.85,0.8, height 1.27
SOD-123F [mm] "SOD-123F from https://www.diodes.com/assets/Package-Files/SOD123F.pdf on 2017-03-16"
  rrect10% 1.34x1.8 smd: 1(-1.43,0) 2(1.43,0)
  silkscreen extent -0.5,-0.85 0.5,0.85, body extent -1.85,-0.85 1.9,0.85, height 1.22
SOT-23-3 [mm] "SOT23-3, from TI DBZ (R-PDSO-G3)"
  rrect15% 0.6x1.05 smd: 1(-0.95,-1.185) 2(0.95,-1.185) 3(0,1.185)
  Top Layer keep-out region: -1,-0.7 1,-0.7 1,0.7 -1,0.7
  silkscreen extent -1.4,-0.4 1.4,0.4, body extent -1.45,-1.21 1.45,1.21, height 0.98
SOT-23-8 [mil]
  rect 52x17 smd: 1(-47,38.39) 2(-47,12.8) 3(-47,-12.8) 4(-47,-38.39) 5(47,-38.39) 6(47,-12.8) 7(47,12.8) 8(47,38.39)
  Top Layer keep-out region: -19.68,-51.18 19.68,-51.18 19.68,51.18 -19.68,51.18
  silkscreen extent -16,-59 16,59, body extent -59,-59 59,59, height 57
SOT-223-3/TO-261-3S [mm] "TO-261-3 / SOT-223-3 from Infineon IPN80R600P7 Datasheet, rev 2,1"
  rrect25% 1.5x2 smd: 1(-2.3,0) 2(0,0) 3(2.3,0)
  rrect5% 3.8x2 smd: 4(0,6.2)
  silkscreen extent -3.25,1.4 3.25,4.78, body extent -3.25,-0.37 3.25,6.57, height 1.64
"SW4_PTS815 SJM 250 SMTR LFS_CNK" [mm]
  rect 0.991x0.711 smd paste+0 mask+0: 1(-2.25,1.075) 2(2.25,1.075) 3(-2.25,-1.075) 4(2.25,-1.075)
  silkscreen extent -4.48,-1.83 2.32,1.83, body extent 0,0 0.25,0.25, height 0.25
"Weco 2" [mm]
  rect 3x3 hole 1.5: 1(-2.5,0)
  round 3 hole 1.5: 2(2.5,0)
  silkscreen extent -5.29,-3.81 5.37,3.81, body extent -4.95,-4.3 5.65,3.3, height 10

## Part data
C1 C7 C10 C12: Package / Case="Metric 1608, EIA 0603", Supplier Part Number 1=1276-1859-2-ND, Volt=25V, Mounted=Yes, Precision=X5R-10%, Supplier 1=Digi-Key, Supplier 2=Digi-Key, Supplier 3=Digi-Key, Supplier 4=Digi-Key, Supplier Part Number 2=1276-1942-2-ND
C2 C3 C4 C5 C6: Package / Case="Metric 2012 , EIA 0805", Supplier Part Number 1=490-10515-1-ND, Volt=35V, Mounted=Yes, Precision=X5R-10%, Supplier 1=Digi-Key, Supplier 2=Digi-Key, Supplier 3=Digi-Key, Supplier 4=Digi-Key
C8 C9: library part Capacitor-100uF-25V, Supplier Part Number 1=399-6102-ND, Volt=25V, Mounted=Yes, Precision=20%, Supplier 1=Digi-Key, Supplier 2=Digi-Key, Supplier 3=Digi-Key, Supplier 4=Digi-Key
D1: "DIODE SCHOTTKY 100V 1A SOD123FL", Package / Case=SOD123FL, Supplier Part Number 1=SMD110PL-TPMSTR-ND, Volt=100V, Mounted=Yes, Supplier 1=Digi-Key
DZ1: "Zener Diode 6.2 V 200 mW ±6% Surface Mount SOD-123", Package / Case=SOD-123, Supplier Part Number 1=BZT52C13-TPMSCT-ND, Volt=6.2V, Grade=None, Mounted=Yes, Precision=6%, Supplier 1=Digi-Key, Watt=200mW
DZ2: "Zener Diode 13 V 200 mW ±6% Surface Mount SOD-123", Package / Case=SOD-123, Supplier Part Number 1=BZT52C13-TPMSCT-ND, Volt=13V, Grade=None, Mounted=Yes, Precision=6%, Supplier 1=Digi-Key, Watt=200mW
J1 J2 J3 J4: library part "Hole 3.40mm M3-Eyelet", "Hole for M3 Bolt with 8mm pad", Mounted=N/A
LED1 LED2 LED3 LED4: "LED RED CLEAR 1608 SMD", Package / Case="0603 (1608 Metric)", Supplier Part Number 1=3147-B1911USD-20D000114U1930CT-ND, Mounted=Yes, Supplier 1=Digi-Key
P1: "4pos TH 2.54mm Header", Package / Case=TH, Supplier Part Number 1=N/A, Mounted=Yes, Supplier 1=Digi-Key, Volt=N/A
P2 P3: library part 4pos-TH-2.54mm, "4pos TH 2.54mm Header", Package / Case=TH, Supplier Part Number 1=N/A, Mounted=Yes, Supplier 1=Digi-Key, Volt=N/A
P4: "2pos-TH-5.0mm Screw Terminal", Package / Case=TH, Supplier Part Number 1=N/A277-1667-ND, Volt=N/A, Mounted=Yes, Supplier 1=Digi-Key
P5: "2pos TH 2.54mm Header", Package / Case=TH, Supplier Part Number 1=N/A, Mounted=Yes, Supplier 1=Digi-Key, Volt=N/A
Q1 Q2 Q3: "P-Channel 30 V 6A (Ta) 1W (Ta) Surface Mount SOT-23F", Current=6A, Package / Case=SOT-523, Supplier Part Number 1=SSM3J332RLFCT-ND, Volt=30V, Mounted=Yes, Supplier 1=Digi-Key
R1 R2 R8 R9 R10 R12 R13: library part Resistor0603-0.0, "Resistor0603-0.0", Package / Case="Metric 1608, EIA 0603", Supplier Part Number 1=RMCF0603ZT0R00TR-ND, Mounted=Yes, Precision=1%, Supplier 1=Digi-Key, Supplier 2=Digi-Key, Supplier 3=Digi-Key, Supplier 4=Digi-Key, Supplier Part Number 2=1276-3510-2-ND, Supplier Part Number 3=YAG1307TR-ND, Supplier Part Number 4=541-0.0GTR-ND, Watt=0.1W
R3 R6 R11 R15 R17 R18: library part Resistor0603-10k, "Resistor0603-10k", Package / Case="Metric 1608, EIA 0603", Supplier Part Number 1=311-10.0KHRTR-ND, Mounted=Yes, Precision=1%, Supplier 1=Digi-Key, Supplier 2=Digi-Key, Supplier 3=Digi-Key, Supplier 4=Digi-Key, Supplier Part Number 2=RMCF0603FT10K0TR-ND, Watt=0.1W
R4 R5 R14 R16: library part Resistor0603-1k, "Resistor0603-1k", Package / Case="Metric 1608, EIA 0603", Supplier Part Number 1=RMCF0603FT1K00TR-ND, Mounted=Yes, Precision=1%, Supplier 1=Digi-Key, Supplier 2=Digi-Key, Supplier 3=Digi-Key, Supplier 4=Digi-Key, Supplier Part Number 2=311-1.00KHRTR-ND, Supplier Part Number 3=AG1307TR-ND, Watt=0.1W
R19 R20: library part Resistor0603-4.7k, "Resistor0603-4.7k", Package / Case="Metric 1608, EIA 0603", Supplier Part Number 1=311-4.70KHRTR-ND, Mounted=Yes, Precision=1%, Supplier 1=Digi-Key, Supplier 2=Digi-Key, Supplier 3=Digi-Key, Supplier 4=Digi-Key, Supplier Part Number 2=RMCF0603FT4K70TR-ND, Watt=0.1W
R21: library part Resistor1206-10mR, "Resistor1206-10mR", Package / Case="Metric 3216, EIA 1206", Supplier Part Number 1=CSR1206FT10L0CT-ND, Mounted=Yes, Precision=1%, Supplier 1=Digi-Key, Supplier 2=Digi-Key, Supplier 3=Digi-Key, Supplier 4=Digi-Key, Watt=0.5W
SW1: "TACT 4.2 X 3.2, 2.5 MM H, 180GF,", Current=0.05A, Supplier Part Number 1=CKN12215-1-ND, Volt=12V, Mounted=Yes, Supplier 1=Digi-Key
U1: "SENSOR ANGLE 360DEG SMD", Manufacturer_Part_Number=AS5600L-ASOM, Mfr_Name="ams OSRAM", Copyright="Copyright (C) 2023 Ultra Librarian. All rights reserved.", RefDes=RefDes, Type=DEV
U2: library part ESP32-C3-MINI-1-N4, "Bluetooth, WiFi 802.11b/g/n, Bluetooth v5.0 Transceiver Module 2.412GHz ~ 2.484GHz PCB Trace Surface Mount", Mfr_Name="Espressif Systems", Copyright="Copyright (C) 2023 Ultra Librarian. All rights reserved.", Datasheet=https://www.espressif.com/sites/default/files/documentation/esp32-c3-mini-1_datasheet_en.pdf, Manufacturer_Part_Number=ESP32-C3-MINI-1-N4, RefDes=RefDes, Type=Type
U3: library part A4988, "Stepper Driver PCB", Package / Case=Custom, Mounted=Yes, Supplier 1=Digi-Key
U4: "IC REG LINEAR 3.3V 1A SOT223", Package / Case=SOT223, Supplier Part Number 1=NCV1117ST33T3GOSCT-ND, Mounted=Yes, Supplier 1=Digi-Key
U5: library part INA219, "IC CURRENT MONITOR 1% SOT23-8", Package / Case=SOT-23-8, Supplier Part Number 1=296-23770-1-ND, Mounted=Yes, Supplier 1=Digi-Key

## Via types
v1: diameter 0.5, hole 0.3, Top Layer to Bottom Layer, 92 vias

## Nets (pads, with @x,y where several pads share a name; then routed paths per layer and width w, separated by ;. In a path a pad name is that pad's centre, name@x,y a point inside that pad or via, vN(x,y) a via of type N, cw(c..) or ccw(c..) an arc to the next point about the centre after c; other vN are vias at no path point)
+3.3: C1.2 C2.2 C3.2 C4.2 C6.2 C7.2 C12.2 LED1.2 LED2.2 LED3.2 P2.1 R1.2 R3.2 R6.2 R8.2 R9.2 R10.2 R11.2 R19.2 R20.2 U1.1 U1.2 U2.3 U3.15 U4.2 U4.4 U5.4 | length 136.8
  Top Layer w0.3: v1(-16.775,-4.625) -16.625,-4.475 U5.4 ; v1(-8.8,8.025) -8.675,8.025 -8.3,7.65 -8.25,7.65 -8,7.4 R6.2 ; LED2.2 10.05,18.25 10.3,18 10.3,17.95 11,17.25 11,13.575 13.3,11.275 13.3,9.131 13.593,8.838
  Top Layer w0.5: v1(-11.475,10.8) -11.35,10.925 C3.2 ; R3.2 -9.925,10.85 C3.2 ; U2.3 -6.8,12.4 -7,12.6 -7.975,12.6 C2.2 C4.2 C3.2 ; LED1.2 LED2.2 ; 13.593,8.838 14.212,8.838 LED3.2 14.262,8.712 13.462,8.712 13.325,8.575 C6.2 U4.2 U4.4 16.025,0.3 16.915,1.19 P2.1
  Bottom Layer w0.3: C7.2 -18.05,-5.5 C1.2 ; v1(-16.775,-4.625) -16.775,-5.475 C1.2 ; -11.475,8.55 -10.95,8.025 v1(-8.8,8.025) ; R20.2@-6.65,3.5 -6.624,3.5 -6.374,3.75 -6.374,4.126 -6,4.5 -2.076,4.5 -1.9,4.324 R19.2 1.45,3.5 R11.2@1.6,3.5 ; R8.2 R9.2 R10.2 2.1,-8.825 -2.301,-4.424 -2.301,-3.799 R1.2 -4.25,-3.75 U3.15 -10.2,-5.5 C1.2
  Bottom Layer w0.5: v1(-11.475,10.8) -11.475,8.55 -11.475,3.475 -7.625,-0.375 ; R20.2@-6.65,3.5 -6.8,3.35 -6.8,3.3 -7.625,2.475 -7.625,-0.375 ; U3.15 -7.625,-0.375 ; R11.2@1.6,3.5 1.45,3.35 1.45,3.3 1,2.85 1,1 1.365,0.635 U1.2 ; R11.2 1.65,5.15 5,8.5 11.69,8.5 P2.1 ; U1.1 U1.2 ; C12.2 4.385,0.635 U1.2
+12: C5.2 C8.1 C9.1 D1.2 Q2.3 R16.2 U3.9 U4.3 | length 103.7
  Top Layer w0.3: R16.2 -13.675,10.425 v1(-12.675,10.425)
  Top Layer w0.5: C5.2 U4.3 9.7,4 9.225,3.525 9.225,-3.275 9.693,-3.743 10.843,-3.743 C8.1 ; 11,-6.096 11.932,-7.028 D1.2
  Top Layer w1.25: Q2.3 -12.5,-10.225 -10.1,-12.625 -10.1,-15 -8.21,-16.89 U3.9 ; C8.1 11,-3.9 11,-6.096 C9.1
  Bottom Layer w0.3: v1@-12.665,10.435 -13.95,9.15 -18.8,9.15 -19.925,8.025 -19.925,-7.375 -18.075,-9.225 -14.015,-9.225 U3.9
  Bottom Layer w0.6: U3.9 4.226,-16.89 4.896,-17.56 4.958,-17.56 5.31,-17.911 5.31,-17.974 5.861,-18.525 8.85,-18.525 9.85,-17.525 9.85,-13.075 11.05,-11.875 11.05,-9.65 C9.1
EN: C10.2 R6.1 SW1.1 U2.8 | length 8.1
  Top Layer w0.3: SW1.1 -9.7,7.825 v1(-9.7,6.7) -9.7,6.2 -9.15,5.65 R6.1 -7.125,5.65 -6.775,6 -6.775,8.175 -6.55,8.4 U2.8
EncoderOut: U1.3 U2.18 | length 7.8
  Top Layer w0.3: v1(-0.048,2.452) -0.1,2.504 0,2.604 U2.18
  Bottom Layer w0.3: v1(-0.048,2.452) -0.075,2.425 -0.075,0.775 1.335,-0.635 U1.3
GND: C1.1 C2.1 C3.1 C4.1 C5.1 C6.1 C7.1 C8.2 C9.2 C10.1 C12.1 DZ2.1 J1.1 J2.1 J3.1 J4.1 LED4.1 P2.4 P3.4 P4.2 P5.2 R2.1 R14.1 R17.1 R18.1 SW1.3 U1.4 U2.1 U2.2 U2.11 U2.14 U2.36 U2.37 U2.38 U2.39 U2.40 U2.41 U2.42 U2.43 U2.44 U2.45 U2.46 U2.47 U2.48 U2.49 U2.50 U2.51 U2.52 U2.53 U2.54 U2.55 U2.56 U2.57 U2.58 U2.59 U2.60 U2.61 U3.10 U3.16 U4.1 U5.3 U5.7 U5.8 | length 9.5
  Top Layer w0.182: U5.3 -14.825,-3.825 -14.175,-3.175 U5.7 U5.8 ; v1(-14.23,-6.738) -14.191,-6.699 -13.875,-6.699 -13.75,-6.574 R17.1 ; U2.52 -5.9,5.1 U2.11 ; U2.59 U2.49
  Top Layer w0.5: C4.1 C2.1
  other v1: -19,-20 -17,-20 -15,-20 -13,-20 -11,-20 -9,-20 -7,-20 7,-20 9,-20 11,-20 13,-20 15,-20 17,-20 19,-20 -10,-18 20,-18 11,-16 8,-14 20,-14 -19,-12 9,-12 19,-12 -8,-10 8,-10 -9,-8 3,-8 5,-8 7,-8 9,-8 -8,-6 2,-6 4,-6 8,-6 20,-6 5,-4 15,-4 17,-4 12,-2 14,-2 16,-2 -13,0 17,0 -14,2 -12,2 14,2 16,2 -19,4 -17,4 -15,4 -13,4 5,4 7,4 11,4 13,4 15,4 -14,6 -15,8 -13,8 17,8 18,10 20,10 -19,12 9,12 11,12 19,12 -4,14 0,14 20,14 -11,16 -9,16 9,16 -10,18 20,18
IO9: P5.1 U2.23 | length 25.7
  Top Layer w0.2: U2.23 4,13.628 4.013,13.614 v1(4.013,13.462)
  Bottom Layer w0.2: P5.1 -8.407,16.129 -7.652,15.374 2.271,15.374 4.013,13.631 v1(4.013,13.462)
M1A: P1.2 U3.13 | length 16
  Top Layer w1.25: U3.13 -6.282,-6.73 -6.157,-6.855 -6.113,-6.855 1.27,-14.238 P1.2@1.27,-19.5
M1B: P1.1 U3.14 | length 19.7
  Top Layer w1.25: U3.14 -6.302,-4.238 -6.062,-4.238 3.81,-14.11 P1.1@3.81,-19.5
M2A: P1.3 U3.12 | length 12.4
  Top Layer w1.25: U3.12 -6.282,-9.27 -6.157,-9.395 -6.095,-9.395 -1.27,-14.22 P1.3@-1.27,-19.5
M2B: P1.4 U3.11 | length 8.8
  Top Layer w1.25: U3.11 -6.302,-11.858 -6.191,-11.858 -3.81,-14.238 P1.4@-3.81,-19.5
NetD1_1: D1.1 P3.1 | length 2.9
  Top Layer w0.5: D1.1 16.182,-9.81 P3.1
NetDZ1_1: DZ1.1 Q1.1 R17.2 | length 3.6
  Top Layer w0.3: Q1.1 -16.19,-7.815 -15.825,-7.45 -15.825,-7.425 -15.525,-7.125 DZ1.1 -15.45,-7.075 R17.2
NetDZ1_2: DZ1.2 Q1.3 Q2.2 Q3.2 R15.2 | length 13.1
  Top Layer w0.3: Q2.2 -13.3,-7.665 -13.3,-7.4 -10.6,-4.7 -10.6,-4.465 Q3.2 -10.45,-2.4 R15.2
  Top Layer w1: Q1.3 -15.59,-10.185 DZ1.2 -15.5,-9.865 Q2.2
NetDZ2_2: DZ2.2 Q3.1 R15.1 | length 5.1
  Top Layer w0.3: R15.1 -9.35,-0.65 -9,-1 DZ2.2 -9,-3.4 -8.6,-3.8 -8.6,-4.265 Q3.1
NetLED1_1: LED1.1 R4.2 | length 1.6
  Top Layer w0.5: R4.2 LED1.1
NetLED2_1: LED2.1 R5.2 | length 1.6
  Top Layer w0.5: R5.2 LED2.1
NetLED3_1: LED3.1 R14.2 | length 1.8
  Top Layer w0.5: LED3.1 15.2,10.25 15.262,10.312 16.062,10.312 R14.2
NetLED4_2: LED4.2 R16.1 | length 1.8
  Top Layer w0.3: LED4.2 R16.1@-15.33,10.5
NetP2_2: P2.2 U2.30 | length 15.8
  Top Layer w0.3: U2.30 7.171,10 7.221,9.95 v1(7.275,9.95)
  Bottom Layer w0.3: v1(7.275,9.95) 11.275,9.95 17.625,3.6 18.87,3.6 P2.2
NetP2_3: P2.3 U2.31 | length 15
  Top Layer w0.3: U2.31 7.225,10.8 v1(7.275,10.75)
  Bottom Layer w0.3: v1(7.275,10.75) 12.575,10.75 17.055,6.27 P2.3
NetP3_2: P3.2 R12.1 | length 2.1
  Bottom Layer w0.381: R12.1 18.217,-6.6 18.887,-7.27 P3.2
NetP3_3: P3.3 R13.1 | length 2.1
  Bottom Layer w0.381: R13.1 18.217,-5.3 18.787,-4.73 P3.3
NetQ2_1: Q2.1 Q3.3 R18.2 | length 3.4
  Top Layer w0.3: Q2.1 -11.465,-7.9 -11,-7.9 -10.75,-8.15 R18.2 -10,-7.7 -9.65,-7.35 -9.65,-6.835 Q3.3
NetR1_1: R1.1 R2.2 U1.8 | length 8.8
  Bottom Layer w0.3: U1.8 -1.555,1.905 -0.65,1 R1.1 R2.2
NetR3_1: R3.1 U2.5 | length 3.2
  Top Layer w0.3: R3.1 -7.826,9.324 -7.326,9.324 -6.975,9.675 -6.975,10.325 -6.523,10.777 -5.923,10.777 U2.5
NetR4_1: R4.1 U2.19 | length 15.1
  Top Layer w0.3: U2.19 0.825,5.125 v1(0.825,6.15) ; v1@8,11.887 R4.1
  Bottom Layer w0.3: v1(0.825,6.15) 0.8,6.175 0.8,11.125 1.537,11.862 7.976,11.862 v1(8.001,11.887)
NetR5_1: R5.1 U2.6 | length 17.3
  Top Layer w0.3: U2.6 -4.8,10 v1(-4.675,10.125) ; v1(9.175,13.325) 9.925,13.325 R5.1
  Bottom Layer w0.3: v1(-4.675,10.125) -2.125,12.675 8.525,12.675 v1(9.175,13.325)
NetR8_1: R8.1 U3.7 | length 2.9
  Bottom Layer w0.3: R8.1 5.55,-13.55 U3.7
NetR9_1: R9.1 U3.6 | length 2.6
  Bottom Layer w0.3: R9.1 5.785,-12.05 6.025,-11.81 U3.6
NetR10_1: R10.1 U3.5 | length 3.2
  Bottom Layer w0.3: R10.1 3.85,-10.55 4.1,-10.3 4.1,-10.25 5.175,-9.175 6.255,-9.175 U3.5
NetR11_1: R11.1 U2.22 | length 3
  Top Layer w0.3: U2.22 3.2,4.325 3.4,4.125 3.425,4.125 4,3.55 4.009,3.55 4.02,3.538 4.162,3.538 v1(4.2,3.5)
  Bottom Layer w0.3: R11.1 v1(4.2,3.5)
NetU2_16: U2.16 U3.8 | length 25.3
  Top Layer w0.3: U2.16 -1.6,-6.575 5.085,-13.26 5.085,-15.625 U3.8
NetU2_20: U2.20 U3.1 | length 7.1
  Top Layer w0.3: U2.20 1.6,4.025 4.725,0.9 6.34,0.9 U3.1
NetU2_21: U2.21 U3.2 | length 11.8
  Top Layer w0.3: U2.21 2.4,4.225 4.35,2.275 7.25,2.275 7.725,1.8 7.725,-1.275 7.374,-1.626 6.374,-1.626 U3.2
NetU3_3: U3.3 U3.4 | length 2.5
  Top Layer w0.3: U3.4 U3.3
SCL: R19.1 U1.7 U2.13 U5.5 | length 22
  Top Layer w0.3: U5.5 -12.075,-4.475 -11.55,-3.95 -11.55,0.9 -10.4,2.05 -4.116,2.05 -3.941,2.226 -3.941,2.585 v1(-3.925,2.6) -3.925,4.15 -3.9,4.175 -4.025,4.3 -4.025,5.075 U2.13
  Bottom Layer w0.3: R19.1 -3.766,3.334 -3.766,2.738 -3.904,2.6 v1(-3.925,2.6) -3.925,0.881 -3.724,0.68 -2.802,0.68 U1.7
SDA: R20.1 U1.6 U2.12 U5.6 | length 22.1
  Top Layer w0.3: U5.6 -12.375,-3.825 -11.977,-3.427 -11.977,1.098 -10.637,2.438 -10.616,2.438 -10.577,2.477 -5.151,2.477 -4.924,2.704 v1(-4.875,2.704) -4.875,2.758 -4.776,2.857 -4.776,5.076 U2.12
  Bottom Layer w0.3: R20.1 -4.875,3.475 -4.875,2.4 -4.9,2.375 -4.9,0.1 -4.274,-0.526 -4.165,-0.635 U1.6
Shunt+: P4.1 R21.1 U5.1 | length 7.3
  Top Layer w0.3: R21.1 -18.429,-2.4 -17.1,-2.4 -17,-2.5 -15.719,-2.5 U5.1
  Top Layer w1: R21.1@-18.429,-2.4 -18.429,-1.129 -17.5,-0.2 -17.5,1 P4.1
Shunt-: Q1.2 R21.2 U5.2 | length 6.8
  Top Layer w0.3: R21.2@-18.6,-5.6 -18.326,-5.326 -18.326,-4.826 -16.675,-3.175 U5.2
  Top Layer w1: Q1.2 -19.45,-7.35 -18.6,-6.5 R21.2@-18.6,-5.6
USB_N: R12.2 U2.26 | length 22.5
  Top Layer w0.182: U2.26@5.994,6.706 U2.26 6.103,6.8 6.215,6.912 6.215,6.938 6.322,7.045 6.907,7.045 7.146,6.806 v1(7.232,6.806)
  Bottom Layer w0.182: v1(7.232,6.806) 7.249,6.806 7.509,7.065 7.816,7.065 8.291,6.591 8.291,-5.048 9.347,-6.105 14.984,-6.105 15.091,-6.212 15.091,-6.291 15.4,-6.6 R12.2
USB_P: R13.2 U2.27 | length 22.5
  Top Layer w0.182: U2.27@5.943,7.557 U2.27 6.103,7.6 6.215,7.488 6.215,7.462 6.322,7.355 6.871,7.355 7.139,7.623 v1(7.225,7.623)
  Bottom Layer w0.182: v1(7.225,7.623) 7.257,7.623 7.505,7.374 7.945,7.374 8.6,6.719 8.6,-4.92 9.475,-5.795 14.984,-5.795 15.091,-5.688 15.091,-5.609 15.4,-5.3 R13.2
pads on no net: SW1.2 SW1.4 U1.5 U2.4 U2.7 U2.9 U2.10 U2.15 U2.17 U2.24 U2.25 U2.28 U2.29 U2.32 U2.33 U2.34 U2.35

## Polygon pours and split planes (outlines as drawn)
GND on Bottom Layer "GND_L04_P001" (solid, remove dead copper, pour order 1): -21,19 -19,21 19,21 21,19 21,-19 19,-21 -19,-21 -21,-19
GND on Int1 (GND) "GND_L02_P002" (solid, remove dead copper, pour order 2): -21,19 -19,21 19,21 21,19 21,-19 19,-21 -19,-21 -21,-19
GND on Int2 (PWR) "GND_L03_P003" (solid, remove dead copper, pour order 3): -21,19 -19,21 19,21 21,19 21,-19 19,-21 -19,-21 -21,-19
GND on Top Layer "GND_L01_P000" (solid, remove dead copper, pour order 0): -21,19 -19,21 19,21 21,19 21,-19 19,-21 -19,-21 -21,-19

## Silkscreen, mask and mechanical layers (free items; w line width, h text height)
Top Overlay:
  lines w0.15: -5,-11.75 -5,-9.25 5,-9.25 5,-11.75 -5,-11.75
  text "IO9" at -13.995,20.091 h0.6
  text "1" at 7.75,19.15 h1
  text "2" at 9.65,19.15 h1
  text "GND" at -20.72,12.92 h1.2 r270
  text "GND" at 15.35,6.95 h0.8
  text "TX" at 15.75,5.85 h0.8
  text "RX" at 15.95,3.45 h0.8
  text "3.3" at 15.45,0.75 h0.8
  text "POT" at -0.873,-0.773 h0.6
  text "GND" at 15.161,-2.339 h0.8
  text "12V" at -20.724,-2.364 h1.2 r270
  text "D+" at 15.517,-3.711 h1
  text "D-" at 15.517,-4.93 h1
  text "5V" at 15.466,-6.149 h1
  text "Nema17 Controller" at -4.723,-10.123 h0.6
  text "E.R 2023" at -4.6,-11.35 h0.8
  text "V1.1" at 2.284,-11.356 h0.8
  text "M2B" at -3.45,-17.85 h0.8 r90
  text "M2A" at -0.85,-17.85 h0.8 r90
  text "M1A" at 1.65,-17.85 h0.8 r90
  text "M2A" at 4.25,-17.85 h0.8 r90
Bottom Overlay:
  text "MS3" at -1.877,-10.623 h0.6
  text "MS2" at -1.877,-12.123 h0.6
  text "MS1" at -1.877,-13.623 h0.6
Board:
  lines w0.15: -21,19 -21,19 ; -21,19 -21,-19 -19,-21 19,-21 21,-19 21,19 19,21 -19,21 -21,19

## Text inside footprints (layer, text, board x,y; h text height)
U1: Mechanical 13 "*" at 1.892,1.105 h1.27; Bottom Overlay "*" at 3.329,2.337 h1.27
U2: Top Overlay "*" at -7.259,14.146 h1.27; Mechanical 13 "*" at -5.557,13.765 h1.27
U5: Top Overlay "*" at -16.265,-2.22 h1.27; Mechanical 13 "*" at -16.265,-2.22 h1.27